# EAGLE board Sch (EAGLE 7.5.0)
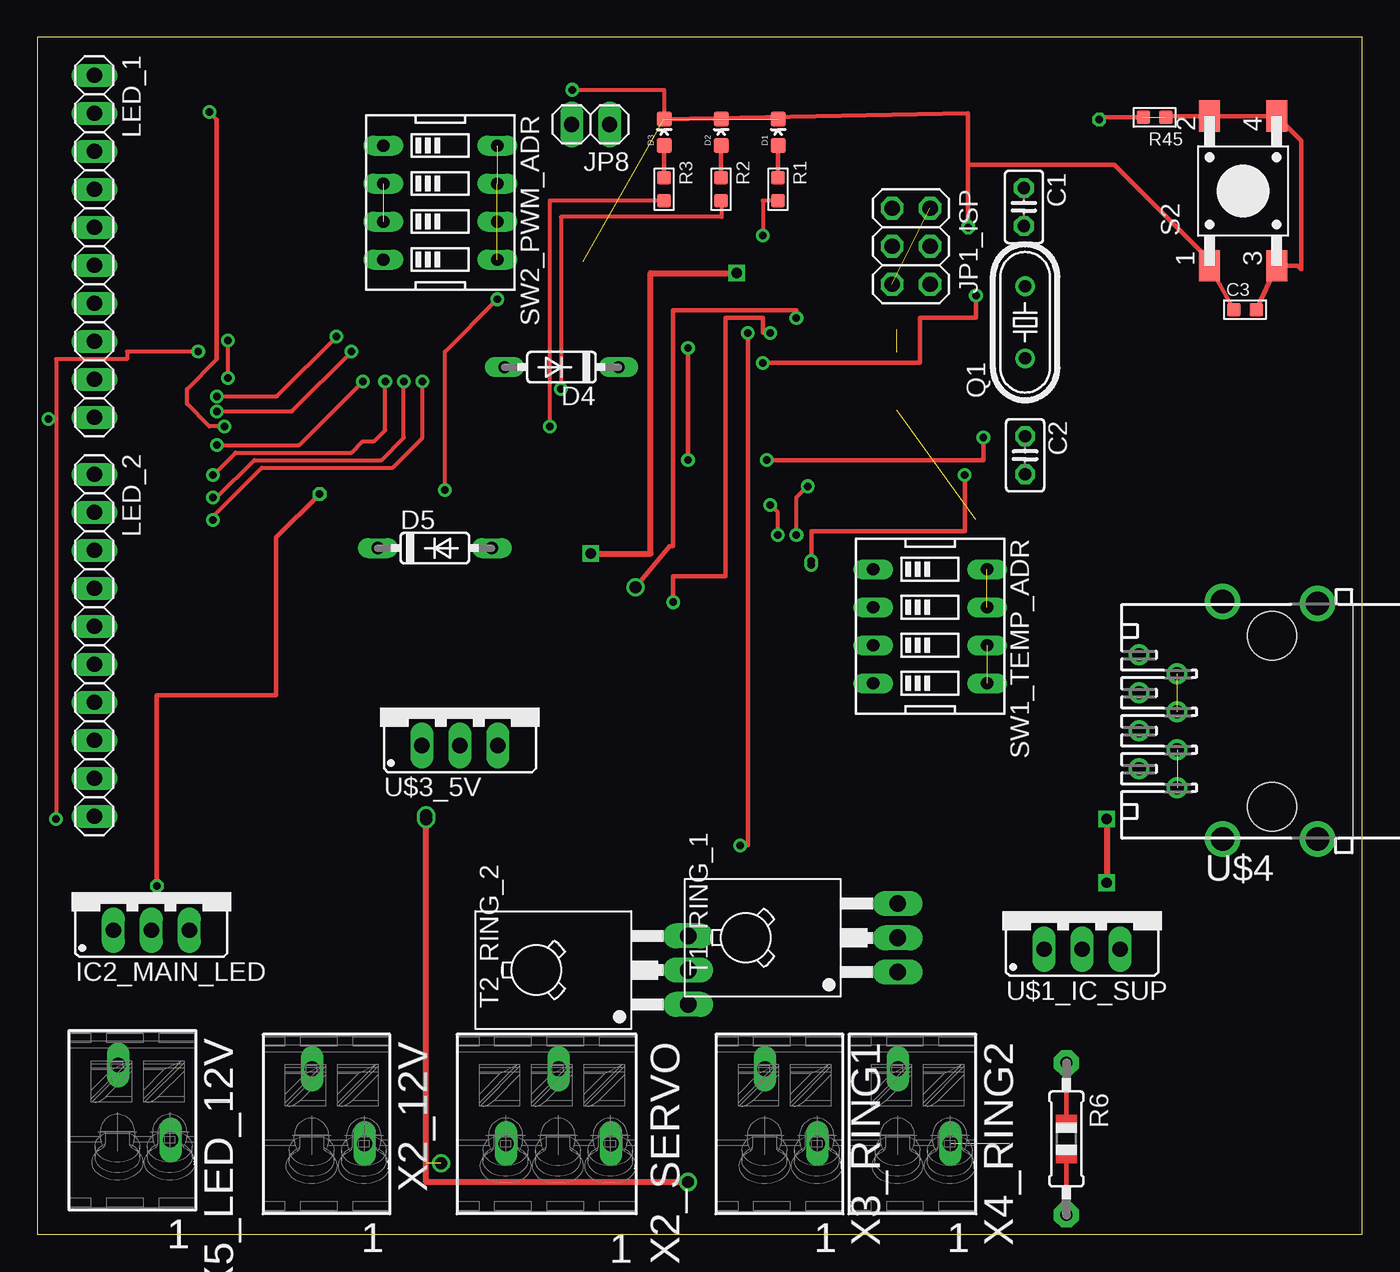
[diagram p0: board, top side]
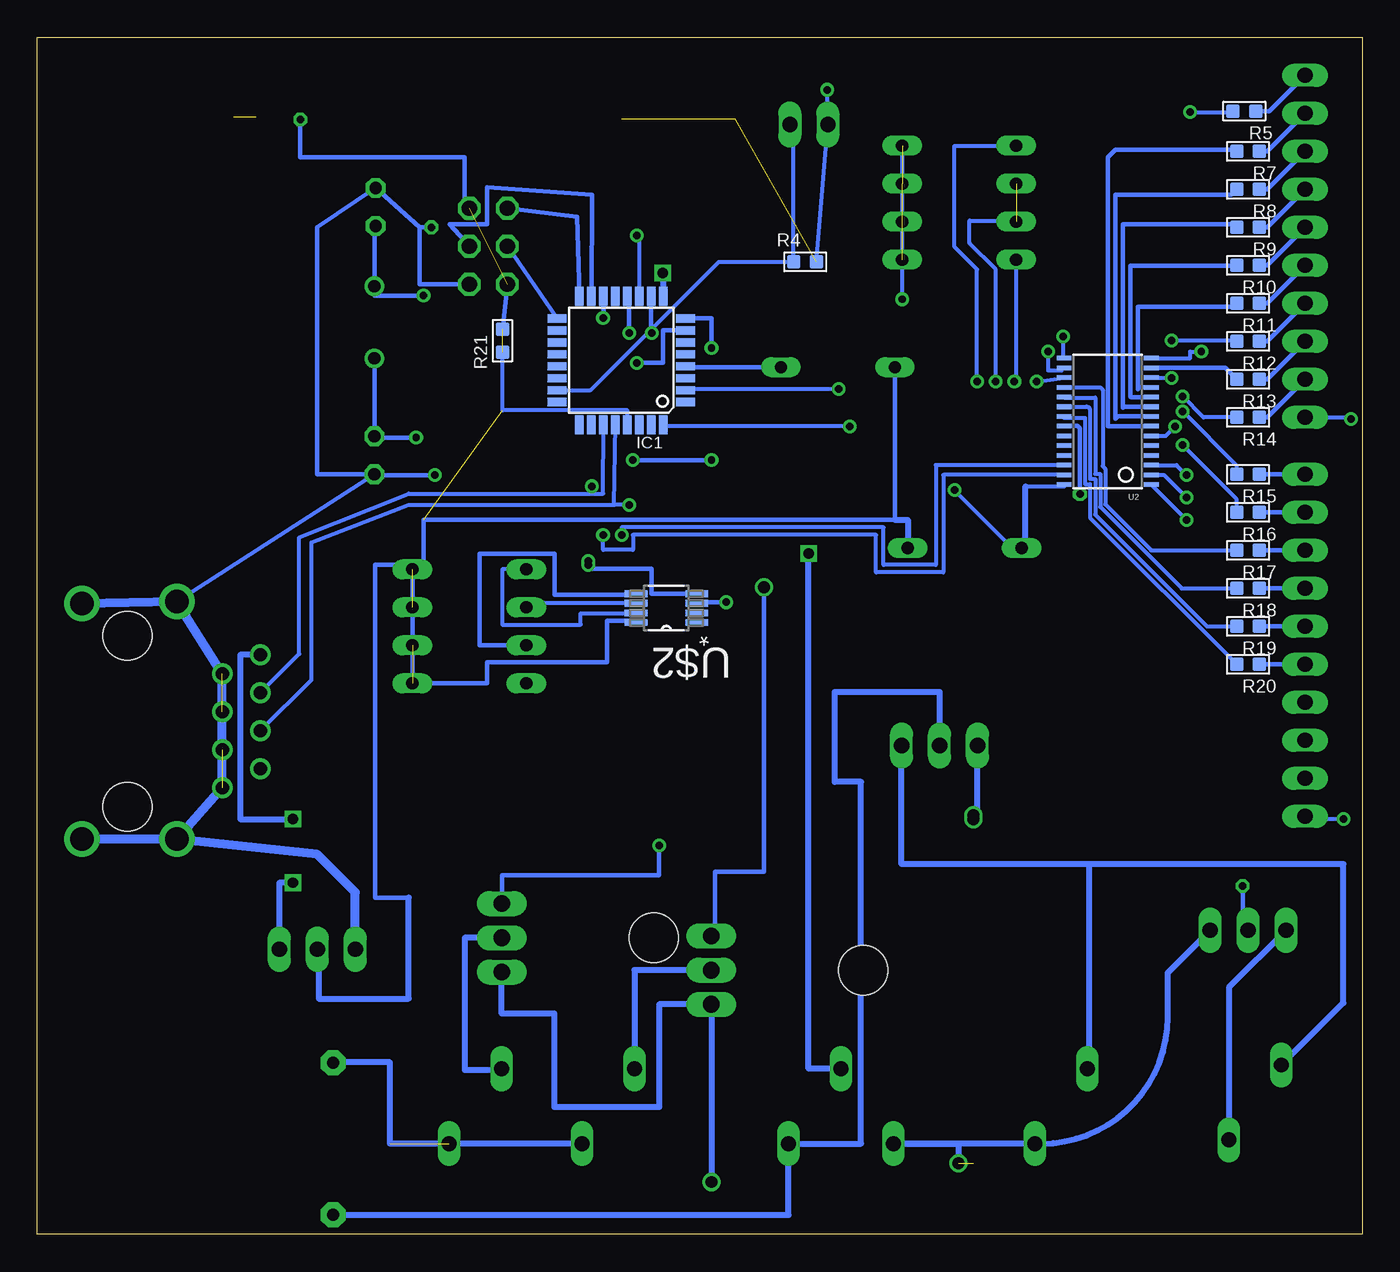
[diagram p1: board, bottom side, seen from below]

Size 88.57 x 80 mm. Coordinates in mm from the lower left corner, seen from the top.
Outline: 0,0 88.57,0 88.57,80 0,80 0,0
Copper layers (1*16): Top 0.035mm / dielectric 1.5mm / Bottom 0.035mm
Design rules "default": minimum track width 10mil, minimum drill 24mil, track to track 8mil, track to pad 8mil, pad to pad 8mil, via to via 8mil, smd to smd 8mil, copper to edge 40mil, drill to drill 8mil, minimum pad ring 10mil, minimum via ring 8mil, stop-mask expansion 4mil, vias tented up to drill 0mil, thermal gap 10mil

## Footprints (pad centres in the part's own frame; a part is rotated, then mirrored left to right if it is on the bottom)
C025-025X050 = drill 0.813 octagon: 1 -1.27,0; 2 1.27,0
C0603 = smd 0.889 x 0.889: 1 0,0.762; 2 0,-0.762
LED-0603 = smd 1 x 1: A 0,-0.877; C 0,0.877
DO35-7 = drill 0.813 long: A 3.81,0; C -3.81,0
TQFP32-08 = smd 1.27 x 0.559: 1 -4.293,2.8; 2 -4.293,2; 3 -4.293,1.2; 4 -4.293,0.4; 5 -4.293,-0.4; 6 -4.293,-1.2; 7 -4.293,-2; 8 -4.293,-2.8; 17 4.293,-2.8; 18 4.293,-2; 19 4.293,-1.2; 20 4.293,-0.4; 21 4.293,0.4; 22 4.293,1.2; 23 4.293,2; 24 4.293,2.8 | smd 0.559 x 1.27: 9 -2.8,-4.293; 10 -2,-4.293; 11 -1.2,-4.293; 12 -0.4,-4.293; 13 0.4,-4.293; 14 1.2,-4.293; 15 2,-4.293; 16 2.8,-4.293; 25 2.8,4.293; 26 2,4.293; 27 1.2,4.293; 28 0.4,4.293; 29 -0.4,4.293; 30 -1.2,4.293; 31 -2,4.293; 32 -2.8,4.293
TO220 = drill 1.016 long: 1 -2.54,1.27; 2 0,1.27; 3 2.54,1.27
2X03 = drill 1.016 octagon: 1 -2.54,-1.27; 2 -2.54,1.27; 3 0,-1.27; 4 0,1.27; 5 2.54,-1.27; 6 2.54,1.27
1X02 = drill 1.016 long: 1 -1.27,0; 2 1.27,0
1X10 = drill 1.016 long: 1 -11.43,0; 2 -8.89,0; 3 -6.35,0; 4 -3.81,0; 5 -1.27,0; 6 1.27,0; 7 3.81,0; 8 6.35,0; 9 8.89,0; 10 11.43,0
HC49/S = drill 0.813: 1 -2.413,0; 2 2.413,0
R0603 = smd 0.889 x 0.889: 1 0,0.762; 2 0,-0.762
0805-THM = drill 0.813 pad 1.676 octagon: 1 -5.08,0; 2 5.08,0
TASTER-9314_SMD = smd 2.1 x 1.4: 1 -5,2.25; 2 5,2.25; 3 -5,-2.25; 4 5,-2.25
EDG-04 = drill 0.813 long: 1 -3.81,-3.81; 2 -1.27,-3.81; 3 1.27,-3.81; 4 3.81,-3.81; 5 3.81,3.81; 6 1.27,3.81; 7 -1.27,3.81; 8 -3.81,3.81
TO126 = drill 1.118 long: 1 -2.286,-5.08; 2 0,-5.08; 3 2.286,-5.08 | hole 3.302: 0,5.08
TSSOP28 = smd 0.305 x 0.991: 1 -4.225,-2.918; 2 -3.575,-2.918; 3 -2.925,-2.918; 4 -2.275,-2.918; 5 -1.625,-2.918; 6 -0.975,-2.918; 7 -0.325,-2.918; 8 0.325,-2.918; 9 0.975,-2.918; 10 1.625,-2.918; 11 2.275,-2.918; 12 2.925,-2.918; 13 3.575,-2.918; 14 4.225,-2.918; 15 4.225,2.918; 16 3.575,2.918; 17 2.925,2.918; 18 2.275,2.918; 19 1.625,2.918; 20 0.975,2.918; 21 0.325,2.918; 22 -0.325,2.918; 23 -0.975,2.918; 24 -1.625,2.918; 25 -2.275,2.918; 26 -2.925,2.918; 27 -3.575,2.918; 28 -4.225,2.918
TO220S = drill 1.016 long: 1 -2.54,-2.54; 2 0,-2.54; 3 2.54,-2.54
SOP65P490X110-8N = smd 1.524 x 0.457: 1 -2.032,0.965; 2 -2.032,0.33; 3 -2.032,-0.33; 4 -2.032,-0.965; 5 2.032,-0.965; 6 2.032,-0.33; 7 2.032,0.33; 8 2.032,0.965
RJ45 = drill 0.889: 1_GND 4.445,-5.08; 2_5V 3.175,-7.62; 3_GND 1.905,-5.08; 4_SCL 0.635,-7.62; 5_GND -0.635,-5.08; 6_SDA -1.905,-7.62; 7_GND -3.175,-5.08; 8_12V -4.445,-7.62 | drill 1.575 pad 2.184: G1 7.874,4.318; G2 -7.874,4.318; G3 7.874,-2.032; G4 -8.001,-2.032 | hole 3.251: 5.715,1.27; -5.715,1.27
P-250-202 = drill 1 long: L1 1.3,2.55; L2 -3.7,-0.95
P-250-203 = drill 1 long: L1 1.3,4.3; L2 -3.7,0.8; L3 1.3,-2.7

## Placement (x,y rotation side)
C1  [C025-025X050]  65.96,68.67 270 top
C2  [C025-025X050]  66.04,52.07 270 top
C3  10nf  [C0603]  80.74,61.81 90 top
D1  RED  [LED-0603]  49.53,73.66 0 top
D2  GREEN  [LED-0603]  45.72,73.66 0 top
D3  ORANGE  [LED-0603]  41.91,73.66 0 top
D4  1N4148DO35-7  [DO35-7]  35.04,57.96 180 top
D5  1N4148DO35-7  [DO35-7]  26.57,45.87 0 top
IC1  ATMEGA168-AU  [TQFP32-08]  49.53,58.42 180 bottom
IC2_MAIN_LED  IRL3803N  [TO220]  7.62,19.05 0 top
JP1_ISP  [2X03]  58.42,66.04 270 top
JP8  outsideTemp  [1X02]  36.99,74.18 180 top
LED_1  [1X10]  3.81,66.04 270 top
LED_2  [1X10]  3.81,39.37 270 top
Q1  [HC49/S]  66.04,60.96 90 top
R1  150R  [R0603]  49.53,69.85 180 top
R2  91R  [R0603]  45.72,69.85 180 top
R3  160R  [R0603]  41.91,69.85 180 top
R4  10K  [R0603]  37.24,64.99 270 bottom
R5  180R  [R0603]  7.88,75.07 90 bottom
R6  180R  [0805-THM]  68.8,6.38 270 top
R7  180R  [R0603]  7.62,72.39 90 bottom
R8  180R  [R0603]  7.62,69.85 90 bottom
R9  180R  [R0603]  7.62,67.31 90 bottom
R10  180R  [R0603]  7.62,64.77 90 bottom
R11  180R  [R0603]  7.62,62.23 90 bottom
R12  180R  [R0603]  7.62,59.69 90 bottom
R13  180R  [R0603]  7.62,57.15 90 bottom
R14  180R  [R0603]  7.62,54.61 90 bottom
R15  180R  [R0603]  7.62,50.8 90 bottom
R16  180R  [R0603]  7.62,48.26 90 bottom
R17  180R  [R0603]  7.62,45.72 90 bottom
R18  180R  [R0603]  7.62,43.18 90 bottom
R19  180R  [R0603]  7.62,40.64 90 bottom
R20  180R  [R0603]  7.62,38.1 90 bottom
R21  4.7K  [R0603]  57.47,59.72 0 bottom
R45  10K  [R0603]  74.69,74.66 90 top
S2  RESET  [TASTER-9314_SMD]  80.61,69.74 90 top
SW1_TEMP_ADR  [EDG-04]  59.69,40.64 270 top
SW2_PWM_ADR  [EDG-04]  26.94,68.96 270 top
T1_RING_1  BD139  [TO126]  52.44,19.82 90 top
T2_RING_2  BD139  [TO126]  38.44,17.66 90 top
U2  [TSSOP28]  17.01,54.34 90 bottom
U$1_IC_SUP  LM1086TO220V  [TO220S]  69.85,21.59 0 top
U$2  MCP9808-E/MS  [SOP65P490X110-8N]  46.52,41.86 180 bottom
U$3_5V  LM1086TO220V  [TO220S]  28.25,35.21 0 top
U$4  BTZ_I2C_RJ45  [RJ45]  81.28,34.29 270 top
X2_12V  250-202  [P-250-202]  19.33,7.37 270 top
X2_SERVO  250-203  [P-250-203]  34.05,7.37 270 top
X3_RING1  250-202  [P-250-202]  49.61,7.37 270 top
X4_RING2  250-202  [P-250-202]  58.5,7.37 270 top
X5_LED_12V  250-202  [P-250-202]  6.35,7.62 270 top

## Library data of the parts
C1 C2 = rcl
C3 = Seeed-Capacitor-2016; MPN: CC0603KRX7R9BB103
D1-D3 = SparkFun-LED; PROD_ID: DIO-00819
D4 D5 = diode
IC1 = Arduino-AVR
IC2_MAIN_LED U$4 = Btz
JP1_ISP JP8 LED_1 LED_2 = pinhead
Q1 = crystal; OC_FARNELL: 1667008; OC_NEWARK: unknown
R1-R3 R5 R7-R20 = Seeed-Resistor-2016; MPN: RC0603JR-07100RL
R4 R45 = Seeed-Resistor-2016; MPN: RC0603FR-0710KL
R6 U2 = adafruit
R21 = Seeed-Resistor-2016; MPN: RC0603JR-074K7L
S2 = Ergaenzung
SW1_TEMP_ADR SW2_PWM_ADR = special
T1_RING_1 T2_RING_2 = transistor
U$1_IC_SUP U$3_5V = v-reg-2
U$2 = mcp9808; MPN: MCP9808-E/MS; OC_FARNELL: 2080523; OC_NEWARK: 89T8871; PACKAGE: MSOP-8; SUPPLIER: MICROCHIP
X2_12V X2_SERVO X3_RING1 X4_RING2 X5_LED_12V = con-wago_250

## Nets
GND1: IC1.3
GND2: IC1.5
GND3: C1.1 C2.2 C3.1 D1.C D2.C D3.C JP1_ISP.6 JP8.2 LED_1.10 LED_2.10 R4.1 S2.1 U2.14 U$1_IC_SUP.1 U$2.4 U$4.1_GND U$4.3_GND U$4.5_GND U$4.7_GND U$4.G1 U$4.G2 U$4.G3 U$4.G4
GND/ANALOG: IC1.21
N$1: SW2_PWM_ADR.1 U2.1
N$2: R5.1 U2.6
N$3: R7.1 U2.7
N$4: R8.1 U2.8
N$5: R9.1 U2.9
N$6: R10.1 U2.10
N$7: R11.1 U2.11
N$8: R12.1 U2.12
N$9: R13.1 U2.13
N$10: R14.1 U2.15
N$11: R15.1 U2.16
N$12: R16.1 U2.17
N$13: R17.1 U2.18
N$14: R18.1 U2.19
N$15: R19.1 U2.20
N$16: R20.1 U2.21
N$17: SW2_PWM_ADR.2 SW2_PWM_ADR.3 U2.2
N$19: SW1_TEMP_ADR.1 U$2.7
N$20: U$1_IC_SUP.3 U$4.8_12V
N$21: SW1_TEMP_ADR.2 U$2.6
N$22: SW1_TEMP_ADR.3 U$2.5
N$23: SW2_PWM_ADR.4 U2.3
N$23_SCL: IC1.28 U2.26 U$4.4_SCL
N$24: U$3_5V.3 X2_12V.L2 X5_LED_12V.L2
N$24_SDA: IC1.27 U2.27 U$4.6_SDA
N$25: IC1.32 R3.1
N$26: IC1.16 JP1_ISP.1
N$27: IC1.2 R2.1
N$28: D3.A R3.2
N$29: D2.A R2.2
N$30: D1.A R1.2
N$31: IC1.11 R1.1
N$32: IC2_MAIN_LED.3 T1_RING_1.1 T2_RING_2.1 U$3_5V.1 X2_12V.L1 X2_SERVO.L3
N$33: IC1.17 JP1_ISP.3
N$34: IC1.14 T2_RING_2.3
N$35: T2_RING_2.2 X3_RING1.L2
N$36: T1_RING_1.2 X4_RING2.L2
N$37: R6.2 U$3_5V.2 X2_SERVO.L1
N$38: IC2_MAIN_LED.2 U2.22
N$39: IC2_MAIN_LED.1 X5_LED_12V.L1
N$40: D5.C SW2_PWM_ADR.5 SW2_PWM_ADR.6 SW2_PWM_ADR.7 SW2_PWM_ADR.8 U2.28
N$41: IC1.23 JP8.1 R4.2
N$42: C2.1 IC1.8 Q1.1
N$43: C1.2 IC1.7 Q1.2
N$44: IC1.15 JP1_ISP.4
N$45: D4.C IC1.4
N$46: IC1.12 U$2.3
N$47: IC1.10 T1_RING_1.3
N$48: IC1.9 X2_SERVO.L2
N$49: R6.1 X3_RING1.L1 X4_RING2.L1
N$50: LED_1.1 R5.2
N$51: LED_2.6 R20.2
N$52: LED_2.5 R19.2
N$53: LED_2.4 R18.2
N$54: LED_2.3 R17.2
N$55: LED_2.2 R16.2
N$56: LED_2.1 R15.2
N$57: LED_1.9 R14.2
N$58: LED_1.8 R13.2
N$59: LED_1.7 R12.2
N$60: LED_1.6 R11.2
N$61: LED_1.5 R10.2
N$62: LED_1.4 R9.2
N$63: LED_1.3 R8.2
N$64: LED_1.2 R7.2
N$105: C3.2 D4.A D5.A IC1.29 JP1_ISP.2 JP1_ISP.5 R21.1 R21.2 R45.1 R45.2 S2.2 S2.3 S2.4 SW1_TEMP_ADR.5 SW1_TEMP_ADR.6 SW1_TEMP_ADR.7 SW1_TEMP_ADR.8 U$1_IC_SUP.2 U$2.8
VCC2: IC1.6

## Tracks (layer width: path | path; a pad name or v marks a point on that pad's centre or on a via)
GND3  (via drill 0.5)  (5 unrouted)
  Top 0.254: v10.75,59 6,59 6,58.5 1.25,58.5 1.25,54.5 | 1.25,54.5 v1.25,27.75 | v0.75,54.5 1.25,54.5 | v35.75,76.5 41.91,76.5 D3.C
  Top 0.305: v62.23,67.31 62.23,71.5 | 62.23,71.5 62.23,74.93 D3.C | C3.1 S2.1 78.5,64.88 78.5,65 72,71.5 62.23,71.5 | v51.75,44.75 51.75,47 62,47 v62,50.75
  Bottom 0.254: U2.14 11.5,58.56 11.5,59 v10.75,59 | v1.25,27.75 3.81,27.75 LED_2.10 | LED_1.10 0.75,54.61 v0.75,54.5 | R4.1 JP8.2 35.75,74.18 v35.75,76.5
  Bottom 0.305: U$4.G4 C2.2 | C2.2 69.85,50.8 69.85,67.31 C1.1 63,67.31 | 63,67.31 v62.23,67.31 | JP1_ISP.6 63,63.5 63,67.31 | U$2.4 47.5,42.83 47.5,44.5 51.75,44.5 v51.75,44.75 | v62,50.75 66.04,50.75 C2.2
  Bottom 0.61: U$1_IC_SUP.1 67.31,22.86 69.85,25.4 U$4.G3 | U$4.G3 U$4.G1 | U$4.G3 U$4.1_GND U$4.7_GND U$4.G4 U$4.G2
N$1  (via drill 0.5)
  Top 0.254: v11.75,47.75 11.75,48 15,51.25 23.75,51.25 25.75,53.25 v25.75,57
  Bottom 0.254: U2.1 14.09,50.09 v11.75,47.75 | v25.75,57 25.75,64.5 27.25,66 27.25,72.75 23.15,72.75 SW2_PWM_ADR.1
N$2  (via drill 0.5)
  Top 0.254: v12.5,54 11.5,54 10,55.5 10,56.5 12,58.5 | 12,74.5 v11.5,75
  Top 0.305: 12,58.5 12,74.5
  Bottom 0.254: U2.6 13.13,53.37 v12.5,54 | v11.5,75 8.71,75 R5.1
N$3
  Bottom 0.305: R7.1 8.49,72.5 16.5,72.5 17,72 17,54 16.98,54.02 U2.7
N$4
  Bottom 0.305: R8.1 8.73,69.5 16.5,69.5 16.5,54.5 16.34,54.66 U2.8
N$5
  Bottom 0.305: R9.1 8.57,67.5 16,67.5 16,55.25 15.94,55.31 U2.9
N$6
  Bottom 0.305: R10.1 8.4,64.75 15.5,64.75 15.5,56 15.46,55.97 U2.10
N$7
  Bottom 0.305: R11.1 8.61,62 15,62 15,56.5 14.88,56.62 U2.11
N$8  (via drill 0.5)
  Top 0.254: v12.75,57.25 v12.75,59.75
  Bottom 0.254: U2.12 12.77,57.27 v12.75,57.25 | v12.75,59.75 8.44,59.75 R12.1
N$9
  Bottom 0.305: R13.1 9.15,57.91 U2.13
N$10  (via drill 0.5)
  Top 0.254: v12,56 16,56 v20,60
  Bottom 0.254: R14.1 10.61,54.61 v12,56 | v20,60 20,58.64 U2.15
N$11  (via drill 0.5)
  Top 0.254: v12,55 17,55 v21,59
  Bottom 0.254: R15.1 8.38,51.38 v12,55 | v21,59 21,57.75 20.09,57.75 U2.16
N$12  (via drill 0.5)
  Top 0.254: v12,52.75 17.5,52.75 v21.75,57
  Bottom 0.254: R16.1 8.38,49.13 v12,52.75 | v21.75,57 U2.17
N$13
  Bottom 0.254: U2.18 17.51,56.61 17.34,56.44 17.34,51.34 17.17,51.17 17.17,48.79 14.1,45.72 R17.1
N$14
  Bottom 0.254: U2.19 19.89,55.93 17.85,55.93 17.85,50.83 17.51,50.83 17.51,48.62 12.07,43.18 R18.1
N$15
  Bottom 0.254: U2.20 18.43,55.31 arc90 18.19,55.08 18.19,50.49 17.85,50.49 17.85,48.11 10.38,40.64 R19.1
N$16
  Bottom 0.254: U2.21 19.93,54.57 18.53,54.57 18.53,50.15 18.19,50.15 18.19,47.91 R20.1
N$17  (via drill 0.5)  (1 unrouted)
  Top 0.254: v11.75,49.25 12,49.25 14.5,51.75 23,51.75 24.5,53.25 v24.5,57
  Bottom 0.254: U2.2 13.27,50.77 v11.75,49.25 | v24.5,57 24.5,64.5 26.25,66.25 26.25,67.75 23.19,67.75 SW2_PWM_ADR.3
N$18  (via drill 0.8)
  other vias: 26,28
N$19
  Bottom 0.254: SW1_TEMP_ADR.1 57.5,44.45 57.5,40.75 52.25,40.75 52.25,41.5 48.55,41.5 U$2.7
N$20  (via drill 0.7)
  Top 0.406: v71.5,27.75 v71.5,23.5
  Bottom 0.406: U$4.8_12V 75,38.73 75,27.75 v71.5,27.75 | v71.5,23.5 72.39,23.5 U$1_IC_SUP.3
N$21
  Bottom 0.254: U$2.6 55.88,42.19 SW1_TEMP_ADR.2
N$22
  Bottom 0.305: SW1_TEMP_ADR.3 59,39.37 59,45.5 54,45.5 54,42.75 48.55,42.75 U$2.5
N$23  (via drill 0.5)
  Top 0.254: v11.75,50.75 13.25,52.25 21,52.25 21.75,53 22.5,53 23.25,53.75 v23.25,57
  Bottom 0.254: U2.3 12.41,51.41 v11.75,50.75 | v23.25,57 23.13,57.12 SW2_PWM_ADR.4
N$23_SCL  (via drill 0.5)
  Top 0.254: v49.5,46.75 49.5,48.25 v49,48.75
  Bottom 0.254: U$4.4_SCL 70.25,37.06 70.25,46.25 63.75,48.75 50.5,48.75 50,48.75 | 50,48.75 IC1.28 | U2.26 28.5,51.41 28.5,44.75 32,44.75 32,47.25 49.5,47.25 v49.5,46.75 | v49,48.75 50,48.75
N$24
  Bottom 0.406: X5_LED_12V.L2 1.25,15.47 1.25,24.75 18.25,24.75 | 18.25,24.75 30.79,24.75 U$3_5V.3 | X2_12V.L2 18.25,11.07 18.25,24.75
N$24_SDA  (via drill 0.5)
  Top 0.254: v50.75,46.75 50.75,49.25 v51.5,50
  Bottom 0.254: U$4.6_SDA 71.06,38.8 71.06,46.58 63.75,49.5 51.5,49.5 | 51.5,49.5 50.75,49.5 IC1.27 | U2.27 28,50.77 28,44.25 32.5,44.25 32.5,46.75 48.75,46.75 48.75,45.75 50.75,45.75 v50.75,46.75 | v51.5,50 51.5,49.5
N$25  (via drill 0.5)
  Top 0.254: R3.1 34.25,69.09 v34.25,54
  Bottom 0.254: v34.25,54 46.73,54 IC1.32
N$26
  Bottom 0.305: JP1_ISP.1 52.5,68 IC1.16
N$27  (via drill 0.5)
  Top 0.254: R2.1 45.75,69.09 45.75,68 35,68 v35,56.5
  Bottom 0.254: v35,56.5 45.24,56.5 IC1.2
N$28
  Top 0.305: R3.2 D3.A
N$29
  Top 0.305: R2.2 D2.A
N$30
  Top 0.305: R1.2 D1.A
N$31  (via drill 0.5)
  Top 0.254: R1.1 48.5,69.09 v48.5,66.75
  Bottom 0.254: v48.5,66.75 48.33,66.75 IC1.11
N$32  (via drill 0.8)  (1 unrouted)
  Top 0.406: v43.5,3.5 26,3.5 v26,27.75
  Bottom 0.406: IC2_MAIN_LED.3 13,17.48 13,14.5 arc90 21.43,6.07 X2_12V.L1 X2_SERVO.L3 27,6.07 v27,4.75 | v43.5,3.5 43.5,15.37 T2_RING_2.1 47,15.37 47,8.5 54,8.5 54,14.75 57.52,14.75 T1_RING_1.1 | v26,27.75 25.71,27.75 U$3_5V.1
N$33
  Bottom 0.305: JP1_ISP.3 IC1.17
N$34  (via drill 0.5, 0.8)
  Top 0.305: v40,43.25 42.25,46 42.5,46 42.5,61.75 50.75,61.75 v50.75,61.25
  Bottom 0.305: T2_RING_2.3 43.25,19.95 43.25,24.25 40,24.25 v40,43.25 | v50.75,61.25 50.73,61.25 IC1.14
N$35
  Bottom 0.406: T2_RING_2.2 48.66,17.66 X3_RING1.L2
N$36
  Bottom 0.406: T1_RING_1.2 60,19.82 60,11 57.55,11 X4_RING2.L2
N$37
  Bottom 0.406: R6.2 38.35,1.3 X2_SERVO.L1 33.5,6.07 33.5,30.25 35.25,30.25 35.25,36.25 28.25,36.25 U$3_5V.2
N$38  (via drill 0.5)
  Top 0.305: v18.87,49.47 15.98,46.58 15.98,36.04 7.99,36.04 v7.99,23.29
  Bottom 0.305: U2.22 19.88,54.06 19.04,54.06 18.87,53.89 v18.87,49.47 | v7.99,23.29 7.99,20.32 IC2_MAIN_LED.2
N$39
  Bottom 0.406: IC2_MAIN_LED.1 8.9,16.5 X5_LED_12V.L1
N$40  (via drill 0.5)  (3 unrouted)
  Top 0.254: v27.25,49.75 27.25,59 v30.75,62.5
  Bottom 0.254: 22.5,50 19.93,50 U2.28 | D5.C 23.37,45.87 v27.25,49.75 | v30.75,62.5 SW2_PWM_ADR.8
  Bottom 0.406: D5.C 22.5,45.87 22.5,50
N$41
  Bottom 0.254: IC1.23 51.58,56.42 43,65 38.01,65 | 38.01,65 R4.2 | 38.01,65 38.01,73.93 JP8.1
N$42  (via drill 0.5)
  Top 0.305: v43.5,59.25 v43.5,51.75 | v48.75,51.75 63.25,51.75 v63.25,53.25
  Bottom 0.305: Q1.1 C2.1 66.04,53.25 v63.25,53.25 | IC1.8 43.5,61.22 v43.5,59.25 | v43.5,51.75 v48.75,51.75
N$43  (via drill 0.5)
  Top 0.305: v48.5,58.25 59,58.25 59,61.25 62.75,61.25 v62.75,62.75
  Bottom 0.305: C1.2 66.04,67.4 Q1.2 66.04,62.75 v62.75,62.75 | IC1.7 46.75,60.42 46.75,58.25 v48.5,58.25
N$44
  Bottom 0.305: JP1_ISP.4 61,67.5 58.5,67.5 58.5,70 51.5,69.5 IC1.15
N$45
  Bottom 0.305: D4.C 45.24,57.96 IC1.4
N$46  (via drill 0.5)
  Top 0.305: v49,60.25 48.5,60.25 48.5,61.25 46,61.25 46,44 42.5,44 v42.5,42.25
  Bottom 0.305: IC1.12 49,62.71 v49,60.25 | v42.5,42.25 44.49,42.25 U$2.3
N$47  (via drill 0.5)
  Top 0.305: v47,26 47.5,26 v47.5,60.25
  Bottom 0.305: T1_RING_1.3 57.5,22.11 57.5,24 47,24 v47,26 | v47.5,60.25 47.53,60.25 IC1.10
N$48  (via drill 0.7)
  Top 0.406: v37,45.5 41,45.5 41,64.25 v46.75,64.25
  Bottom 0.406: X2_SERVO.L2 37,11.07 v37,45.5 | v46.75,64.25 46.73,64.25 IC1.9
N$49  (1 unrouted)
  Bottom 0.406: X3_RING1.L1 65,6.07 65,11.5 68.8,11.5 R6.1
N$50
  Bottom 0.305: LED_1.1 6.21,75.07 R5.2
N$51
  Bottom 0.305: LED_2.6 R20.2
N$52
  Bottom 0.305: LED_2.5 R19.2
N$53
  Bottom 0.305: LED_2.4 R18.2
N$54
  Bottom 0.305: LED_2.3 R17.2
N$55
  Bottom 0.305: LED_2.2 R16.2
N$56
  Bottom 0.305: LED_2.1 R15.2
N$57
  Bottom 0.305: LED_1.9 6.35,54.61 R14.2
N$58
  Bottom 0.305: LED_1.8 6.35,57.15 R13.2
N$59
  Bottom 0.305: LED_1.7 6.35,59.69 R12.2
N$60
  Bottom 0.305: LED_1.6 6.35,62.23 R11.2
N$61
  Bottom 0.305: LED_1.5 6.35,64.77 R10.2
N$62
  Bottom 0.305: LED_1.4 6.35,67.31 R9.2
N$63
  Bottom 0.305: LED_1.3 6.35,69.85 R8.2
N$64
  Bottom 0.305: LED_1.2 6.35,72.39 R7.2
N$65  (via drill 0.5)
  other vias: 51.75,45
N$105  (via drill 0.5)  (6 unrouted)
  Top 0.305: C3.2 S2.3 84.26,64.74 84.5,64.5 84.5,73.1 S2.4 S2.2 75.53,74.74 R45.2 | v71,74.5 71.16,74.66 R45.1
  Bottom 0.254: IC1.29 49.13,55.08 57.46,55.08 57.47,55.09 R21.2
  Bottom 0.305: JP1_ISP.5 R21.1 | JP1_ISP.2 60,68.89 60,72 71,72 v71,74.5 | 63.75,22.5 66,22.5 66,44.75 63.5,44.75 | 63.5,44.75 SW1_TEMP_ADR.8 SW1_TEMP_ADR.5 58.5,36.83 58.5,38.25 50.5,38.25 50.5,41 48.55,41 U$2.8 | 63.5,44.75 62.75,44.75 62.75,47.75 31.23,47.75 D4.A
  Bottom 0.406: U$1_IC_SUP.2 69.75,19.05 69.75,15.75 63.75,15.75 63.75,22.5 | 31.23,47.75 30.38,47.75 D5.A